# EAGLE board InflightController (EAGLE 9.6.2)
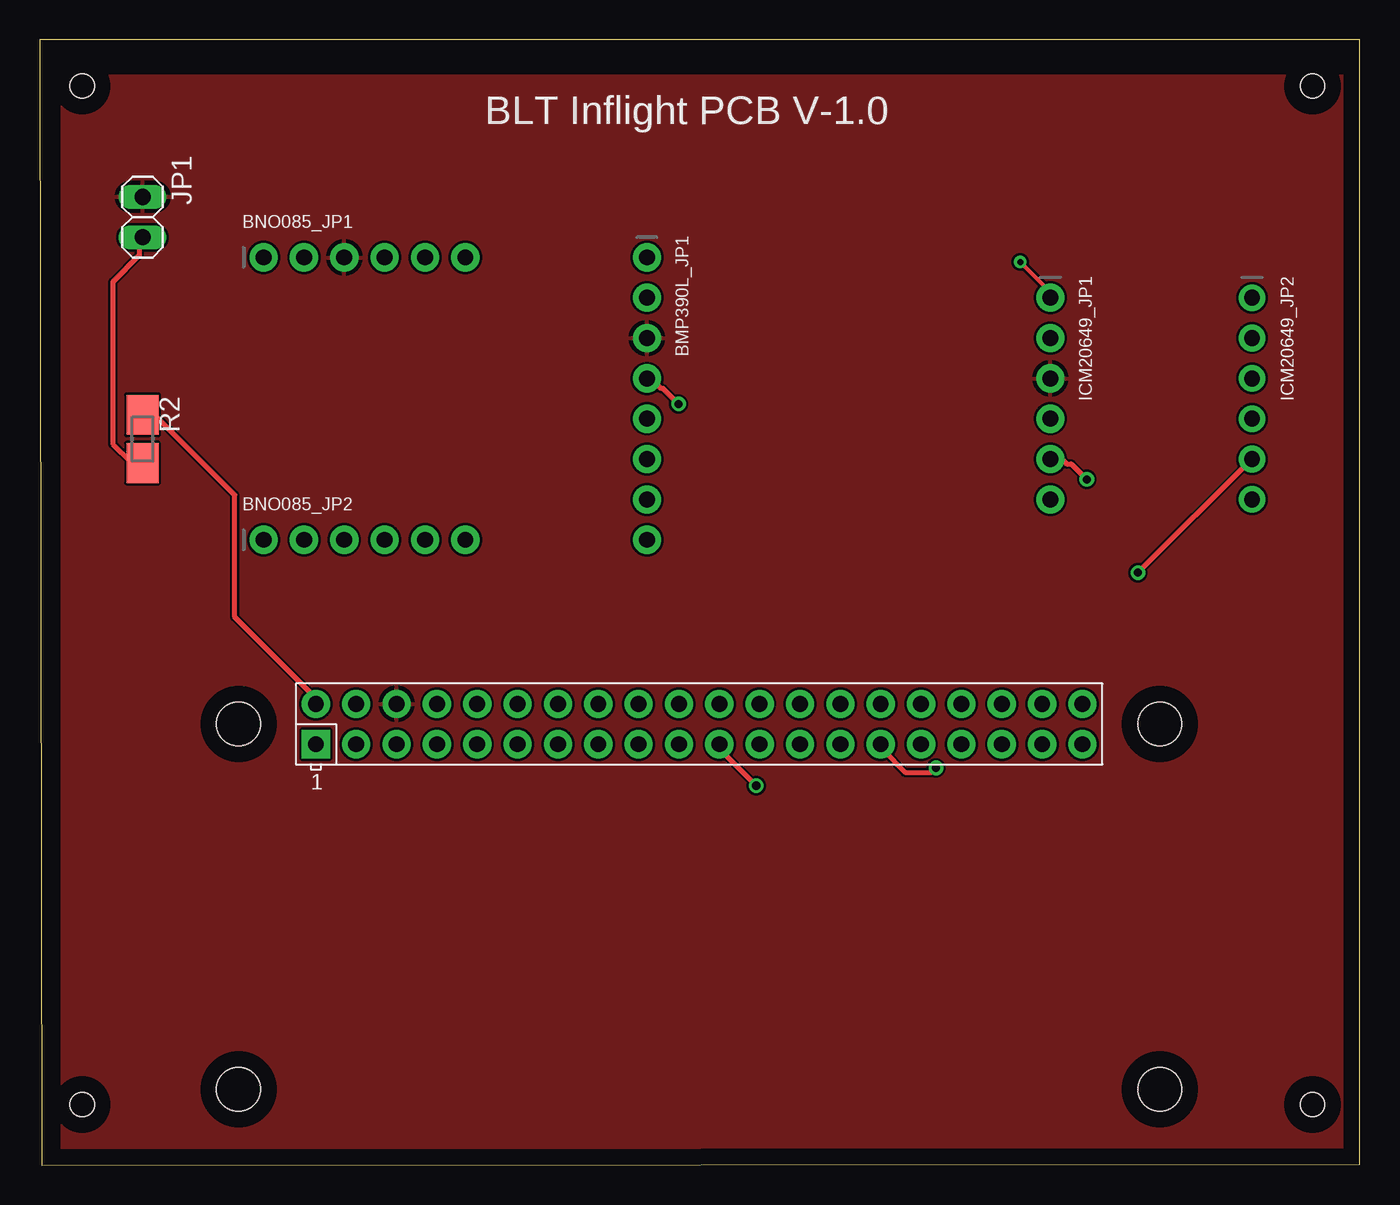
[diagram p0: board, top side]
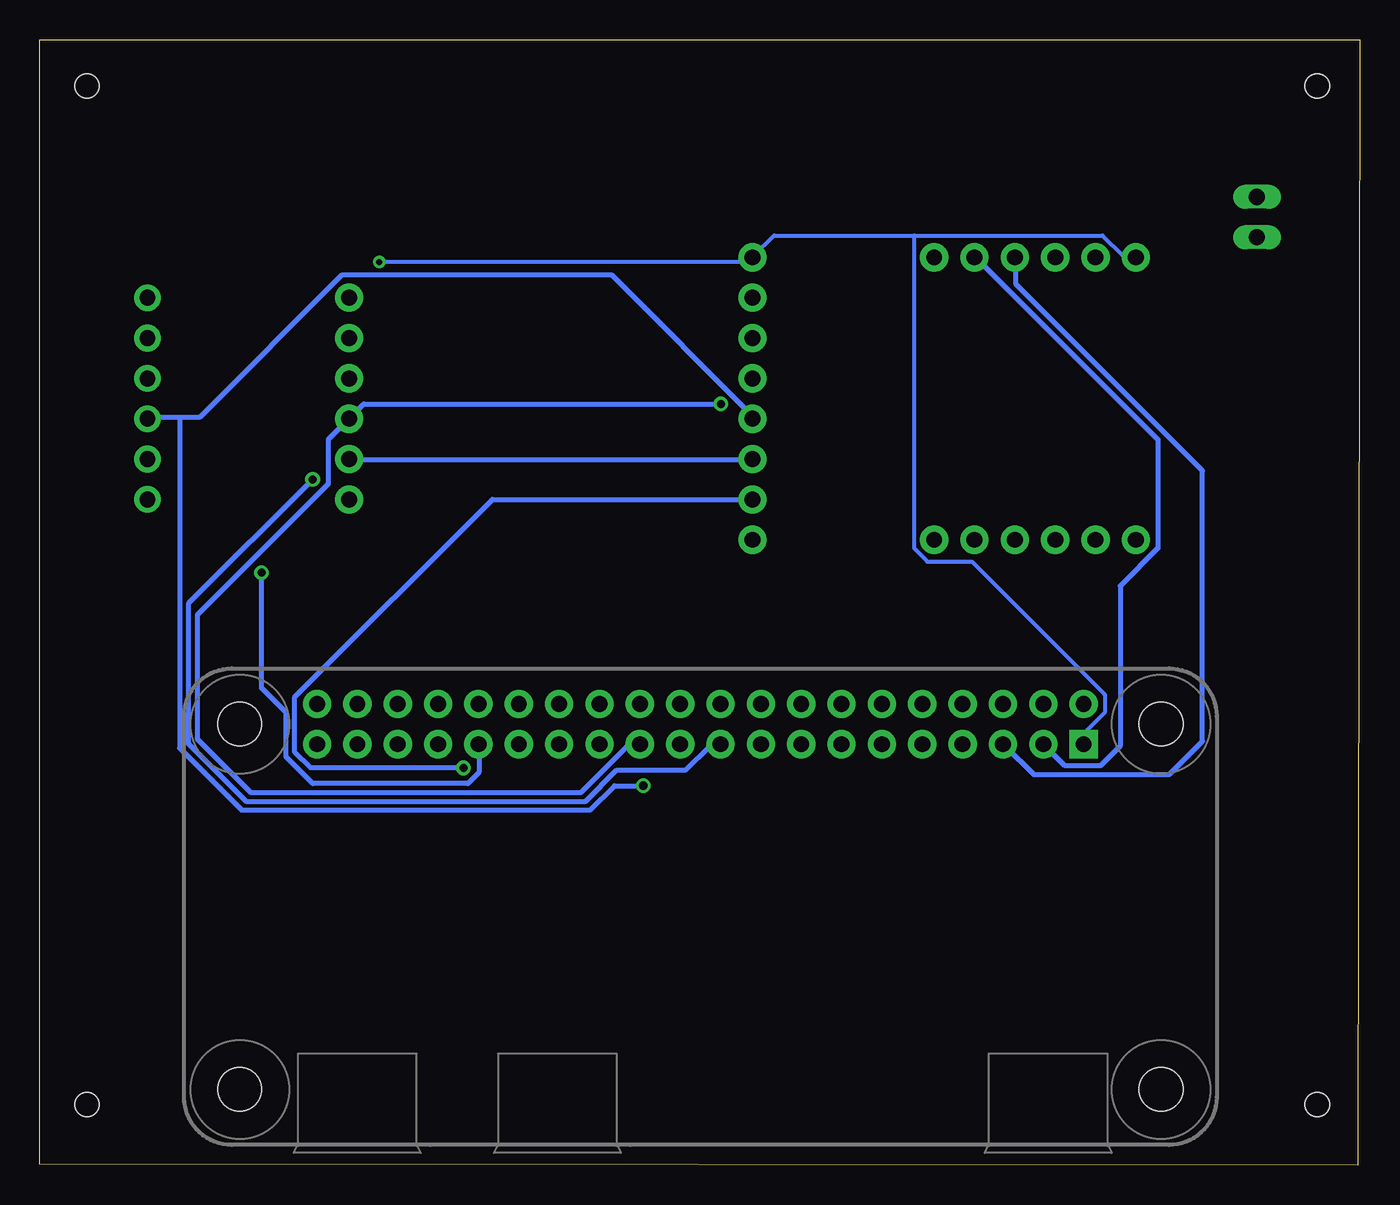
[diagram p1: board, bottom side, seen from below]

Size 83.11 x 70.86 mm. Coordinates in mm from the lower left corner, seen from the top.
Outline: 0.13,0 83.11,0.06 83.11,70.86 0,70.86 0.13,0
Copper layers (1*16): Top 0.035mm / dielectric 1.5mm / Bottom 0.035mm
Design rules "default": minimum track width 6mil, minimum drill 0.35mm, track to track 6mil, track to pad 6mil, pad to pad 6mil, via to via 6mil, smd to smd 6mil, copper to edge 40mil, drill to drill 6mil, minimum pad ring 10mil, minimum via ring 8mil, stop-mask expansion 4mil, vias tented up to drill 0mil, thermal gap 10mil
Net classes: 0 default: width 0.305 mm, drill 0.508 mm, clearance 0.254 mm; 1 highpower: width 0.305 mm, drill 0.483 mm; 2 lowpower: width 0.254 mm, drill 0.381 mm
Holes 1.52 mm at 2.67,67.94 2.67,3.81 80.14,3.81 80.14,67.94

## Footprints (pad centres in the part's own frame; a part is rotated, then mirrored left to right if it is on the bottom)
1X08_ROUND_70 = drill 1 pad 1.778: 1 -8.89,0; 2 -6.35,0; 3 -3.81,0; 4 -1.27,0; 5 1.27,0; 6 3.81,0; 7 6.35,0; 8 8.89,0
1X06_ROUND_70 = drill 1 pad 1.778: 1 -6.35,0; 2 -3.81,0; 3 -1.27,0; 4 1.27,0; 5 3.81,0; 6 6.35,0
1X06_ROUND = drill 1 pad 1.676: 1 -6.35,0; 2 -3.81,0; 3 -1.27,0; 4 1.27,0; 5 3.81,0; 6 6.35,0
1X02 = drill 1.016 long: 1 -1.27,0; 2 1.27,0
SMK = smd 2.5 x 2: 1 1.524,0; 2 -1.524,0
RASPBERRYPI_BASTELSTUBE_V13_RASPI_BOARD_B+_FULL = drill 1 pad 1.778 square: 1 8.37,25.23 | drill 1 pad 1.778: 2 8.37,27.77; 3 10.91,25.23; 4 10.91,27.77; 5 13.45,25.23; 6 13.45,27.77; 7 15.99,25.23; 8 15.99,27.77; 9 18.53,25.23; 10 18.53,27.77; 11 21.07,25.23; 12 21.07,27.77; 13 23.61,25.23; 14 23.61,27.77; 15 26.15,25.23; 16 26.15,27.77; 17 28.69,25.23; 18 28.69,27.77; 19 31.23,25.23; 20 31.23,27.77; 21 33.77,25.23; 22 33.77,27.77; 23 36.31,25.23; 24 36.31,27.77; 25 38.85,25.23; 26 38.85,27.77; 27 41.39,25.23; 28 41.39,27.77; 29 43.93,25.23; 30 43.93,27.77; 31 46.47,25.23; 32 46.47,27.77; 33 49.01,25.23; 34 49.01,27.77; 35 51.55,25.23; 36 51.55,27.77; 37 54.09,25.23; 38 54.09,27.77; 39 56.63,25.23; 40 56.63,27.77 | hole 2.75: 3.5,3.5; 3.5,26.5; 61.5,3.5; 61.5,26.5

## Placement (x,y rotation side)
BMP390L_JP1  [1X08_ROUND_70]  38.23,48.26 270 top
BNO085_JP1  [1X06_ROUND_70]  20.45,57.15 0 top
BNO085_JP2  [1X06_ROUND_70]  20.45,39.37 0 top
ICM20649_JP1  [1X06_ROUND_70]  63.63,48.26 270 top
ICM20649_JP2  [1X06_ROUND]  76.33,48.26 270 top
JP1  [1X02]  6.48,59.69 270 top
R2  [SMK]  6.48,45.72 270 top
U$1  RPI-ZERO  [RASPBERRYPI_BASTELSTUBE_V13_RASPI_BOARD_B+_FULL]  9.02,1.27 0 top

## Library data of the parts
BMP390L_JP1 BNO085_JP1 BNO085_JP2 ICM20649_JP1 ICM20649_JP2 = microbuilder
JP1 = pinhead
R2 = resistor-shunt; OC_FARNELL: unknown; OC_NEWARK: unknown
U$1 = RPI-Zero

## Nets
5V0@1: R2.2 U$1.2
AD0: ICM20649_JP2.1
BOOT: BNO085_JP2.1
CS_1: BMP390L_JP1.7 U$1.29
CS_2: ICM20649_JP2.5 U$1.31
CS_3: BNO085_JP2.6
FSYNC_IN: ICM20649_JP2.2
GND [lowpower]: BMP390L_JP1.3 BNO085_JP1.3 ICM20649_JP1.3 JP1.1 U$1.6
INT1: ICM20649_JP1.6
INT2: ICM20649_JP2.6
INT_1: BMP390L_JP1.8
INT_2: BNO085_JP1.6
MOSI: BNO085_JP2.5
N$1: JP1.2 R2.1
PS0: BNO085_JP2.2
PS1: BNO085_JP2.3
RST: BNO085_JP2.4
SCK/SCL: BMP390L_JP1.4 ICM20649_JP1.4 U$1.23
SCL/SCK/RX: BNO085_JP1.4 U$1.5
SCL_EXT: ICM20649_JP2.3
SDA/MISO/TX: BNO085_JP1.5 U$1.3
SDI/SDA: BMP390L_JP1.6 ICM20649_JP1.5 U$1.19
SDO/ADR: BMP390L_JP1.5 ICM20649_JP2.4 U$1.21
VCC [lowpower]: BMP390L_JP1.1 BNO085_JP1.1 ICM20649_JP1.1 U$1.1

## Tracks (layer width: path | path; a pad name or v marks a point on that pad's centre or on a via)
5V0@1
  Top 0.305: R2.2 6.55,47.22 7.25,47.22 12.28,42.19 12.28,34.51 17.31,29.48 17.31,29.06 U$1.2
CS_1  (via drill 0.51)
  Top 0.305: v56.43,25.01 56.15,24.73 54.47,24.73 53.07,26.12 53.07,26.4 U$1.29
  Bottom 0.305: BMP390L_JP1.7 54.61,41.91 67.04,29.48 67.04,25.98 66.06,25.01 v56.43,25.01
CS_2  (via drill 0.51)
  Top 0.305: v69.14,37.3 76.26,44.42 ICM20649_JP2.5
  Bottom 0.305: v69.14,37.3 69.14,30.04 67.6,28.5 67.6,25.7 65.93,24.03 56.15,24.03 55.45,24.73 55.45,26.4 U$1.31
GND
  pour Top: 1.4,68.58 82.68,68.58 82.68,0 1.4,0
N$1
  Top 0.305: R2.1 6.41,44.28 5.71,44.28 4.6,45.4 4.6,55.6 6.27,57.28 6.27,58.26 6.41,58.4 JP1.2
SCK/SCL  (via drill 0.51)
  Top 0.305: v40.22,47.92 39.24,48.9 39.1,48.9 38.54,49.45 38.27,49.45 BMP390L_JP1.4
  Bottom 0.305: v40.22,47.92 62.71,47.92 63.55,47.08 ICM20649_JP1.4 63.69,46.94 64.95,45.68 64.95,42.89 73.19,34.65 73.19,26.82 69.84,23.47 49.02,23.47 46.09,26.4 45.39,26.4 U$1.23
SCL/SCK/RX
  Bottom 0.305: BNO085_JP1.4 21.64,57.14 21.64,55.46 9.91,43.73 9.91,26.68 12,24.59 20.52,24.59 22.34,26.4 U$1.5
SDA/MISO/TX
  Bottom 0.305: U$1.3 19.82,26.4 18.57,25.15 16.33,25.15 15.08,26.4 15.08,36.46 12.7,38.84 12.7,45.68 24.15,57.14 BNO085_JP1.5
SDI/SDA  (via drill 0.51)
  Top 0.305: v65.93,43.17 64.95,44.15 64.67,44.15 64.39,44.42 63.69,44.42 ICM20649_JP1.5
  Bottom 0.305: v65.93,43.17 73.75,35.34 73.75,26.54 70.12,22.91 48.74,22.91 46.79,24.87 42.46,24.87 40.92,26.4 40.36,26.4 U$1.19 | BMP390L_JP1.6 38.27,44.42 63.55,44.42 ICM20649_JP1.5
SDO/ADR  (via drill 0.51)
  Top 0.305: v45.11,23.89 42.88,26.12 42.88,26.4 U$1.21
  Bottom 0.305: 74.31,47.08 73.05,47.08 64.11,56.02 47.07,56.02 38.12,47.08 BMP390L_JP1.5 | 74.31,47.08 76.26,47.08 ICM20649_JP2.4 | v45.11,23.89 46.93,23.89 48.46,22.35 70.4,22.35 74.31,26.26 74.31,47.08
VCC  (via drill 0.38)
  Top 0.254: v61.73,56.86 63.55,55.04 63.55,54.62 ICM20649_JP1.1
  Bottom 0.254: 28.07,58.53 36.87,58.53 38.12,57.28 BMP390L_JP1.1 38.27,57.14 38.54,56.86 v61.73,56.86 | 28.07,58.53 16.19,58.53 14.94,57.28 14.1,57.28 BNO085_JP1.1 | 28.07,58.53 28.07,38.84 27.23,38 24.43,38 16.05,29.62 16.05,28.5 17.31,27.24 17.31,26.54 U$1.1

## Text on the board
tPlace: BLT Inflight PCB V-1.0